# Altium PCB 避障车控制板.PcbDoc
Units mil, origin at the board's own origin, x right, y up, seen from the top; angles counter-clockwise.
Board outline 3937.01 x 3937.01 mil, 2 copper layers (Top Layer, Bottom Layer); 122 components, 91 nets, 417 pads, 156 vias.
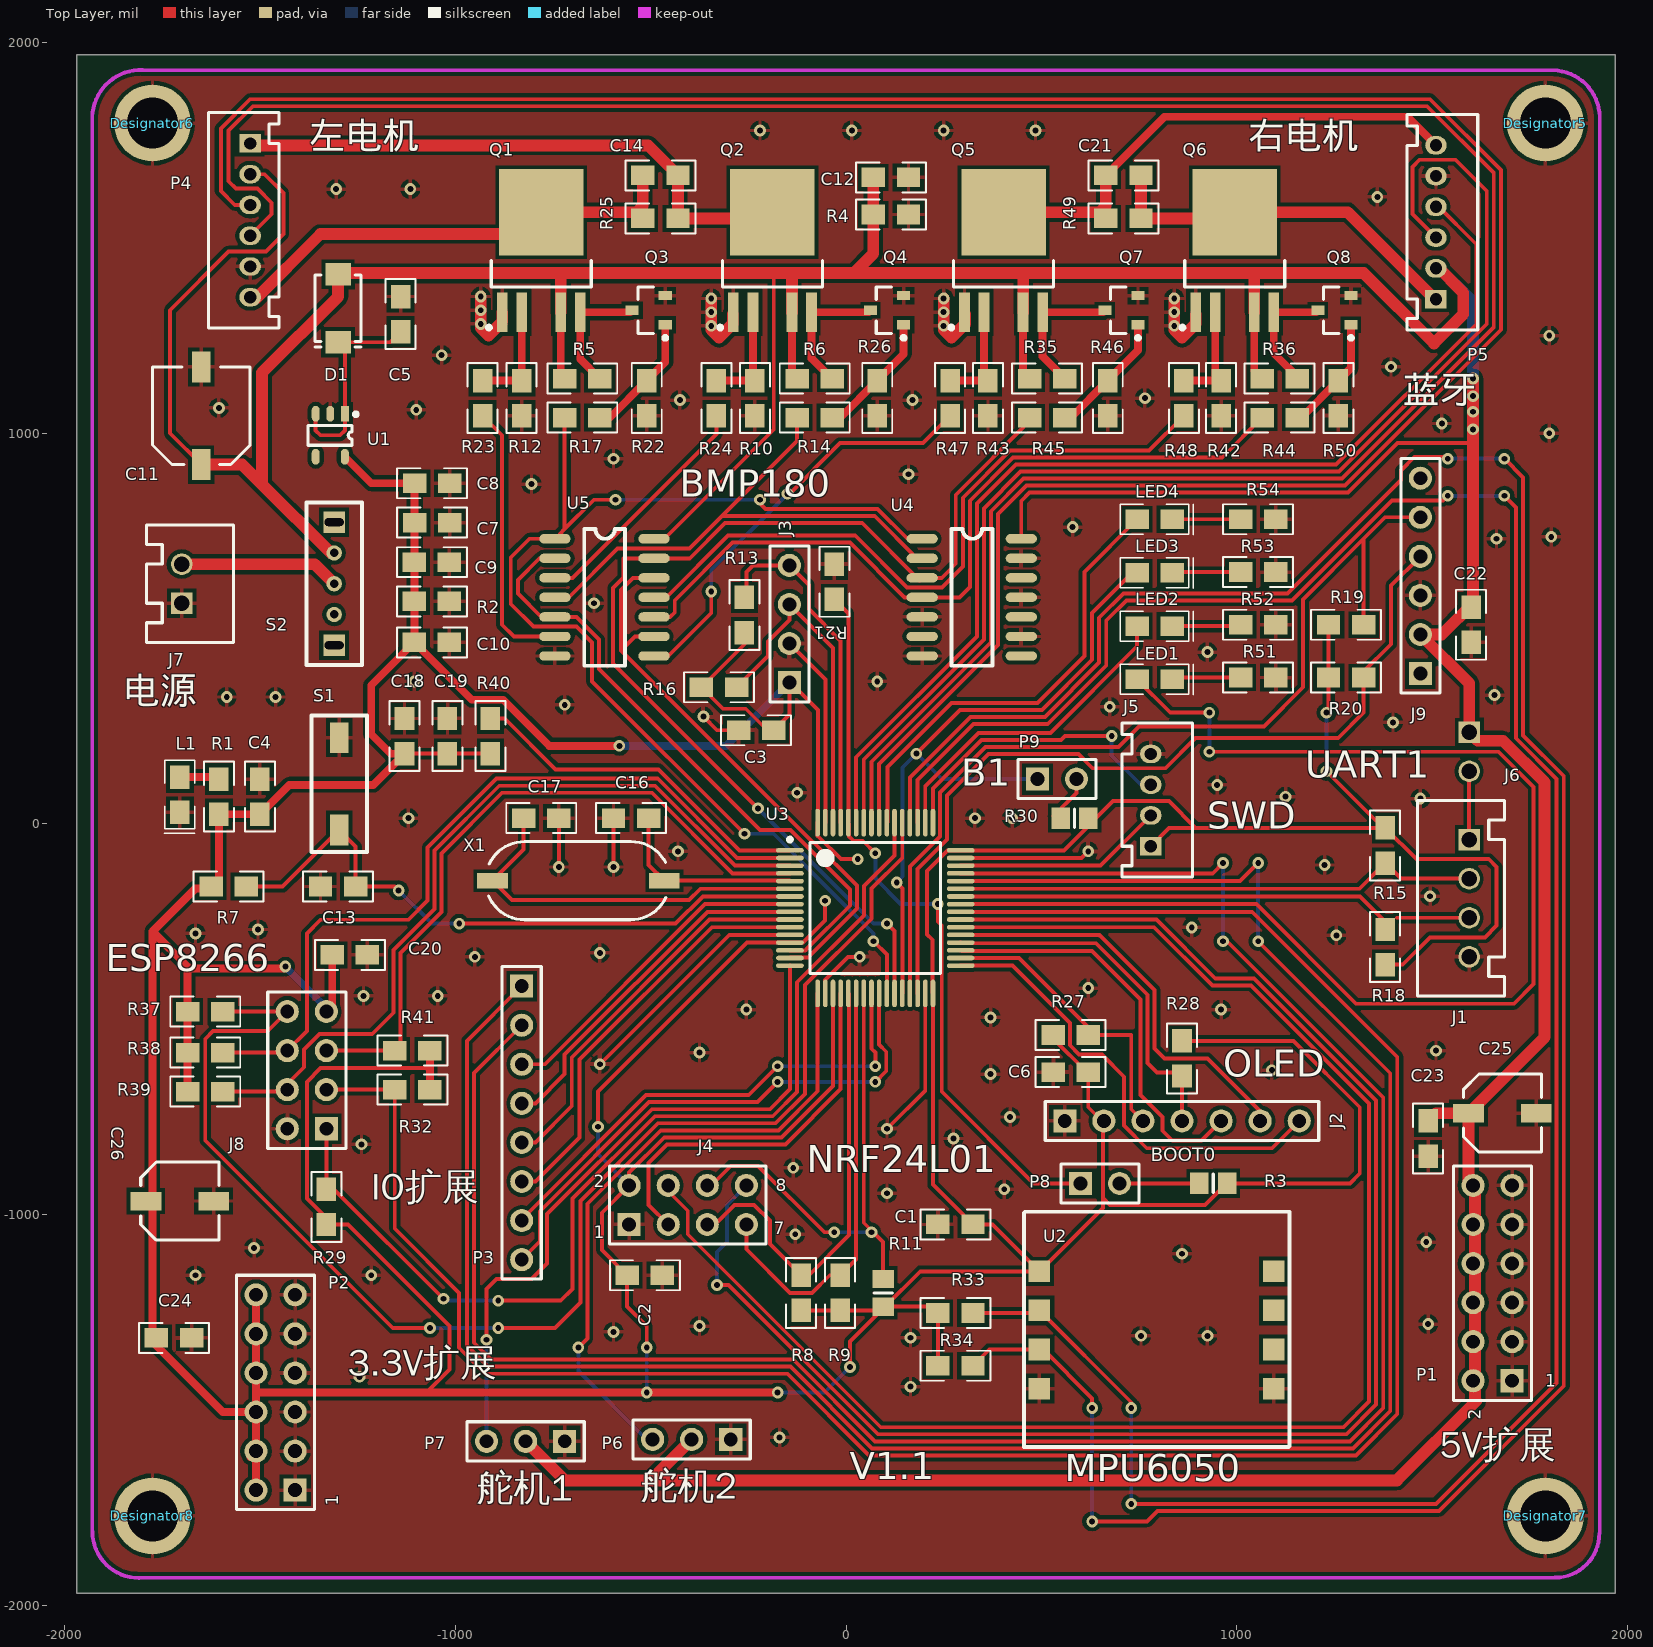
[diagram p0: Top Layer view]
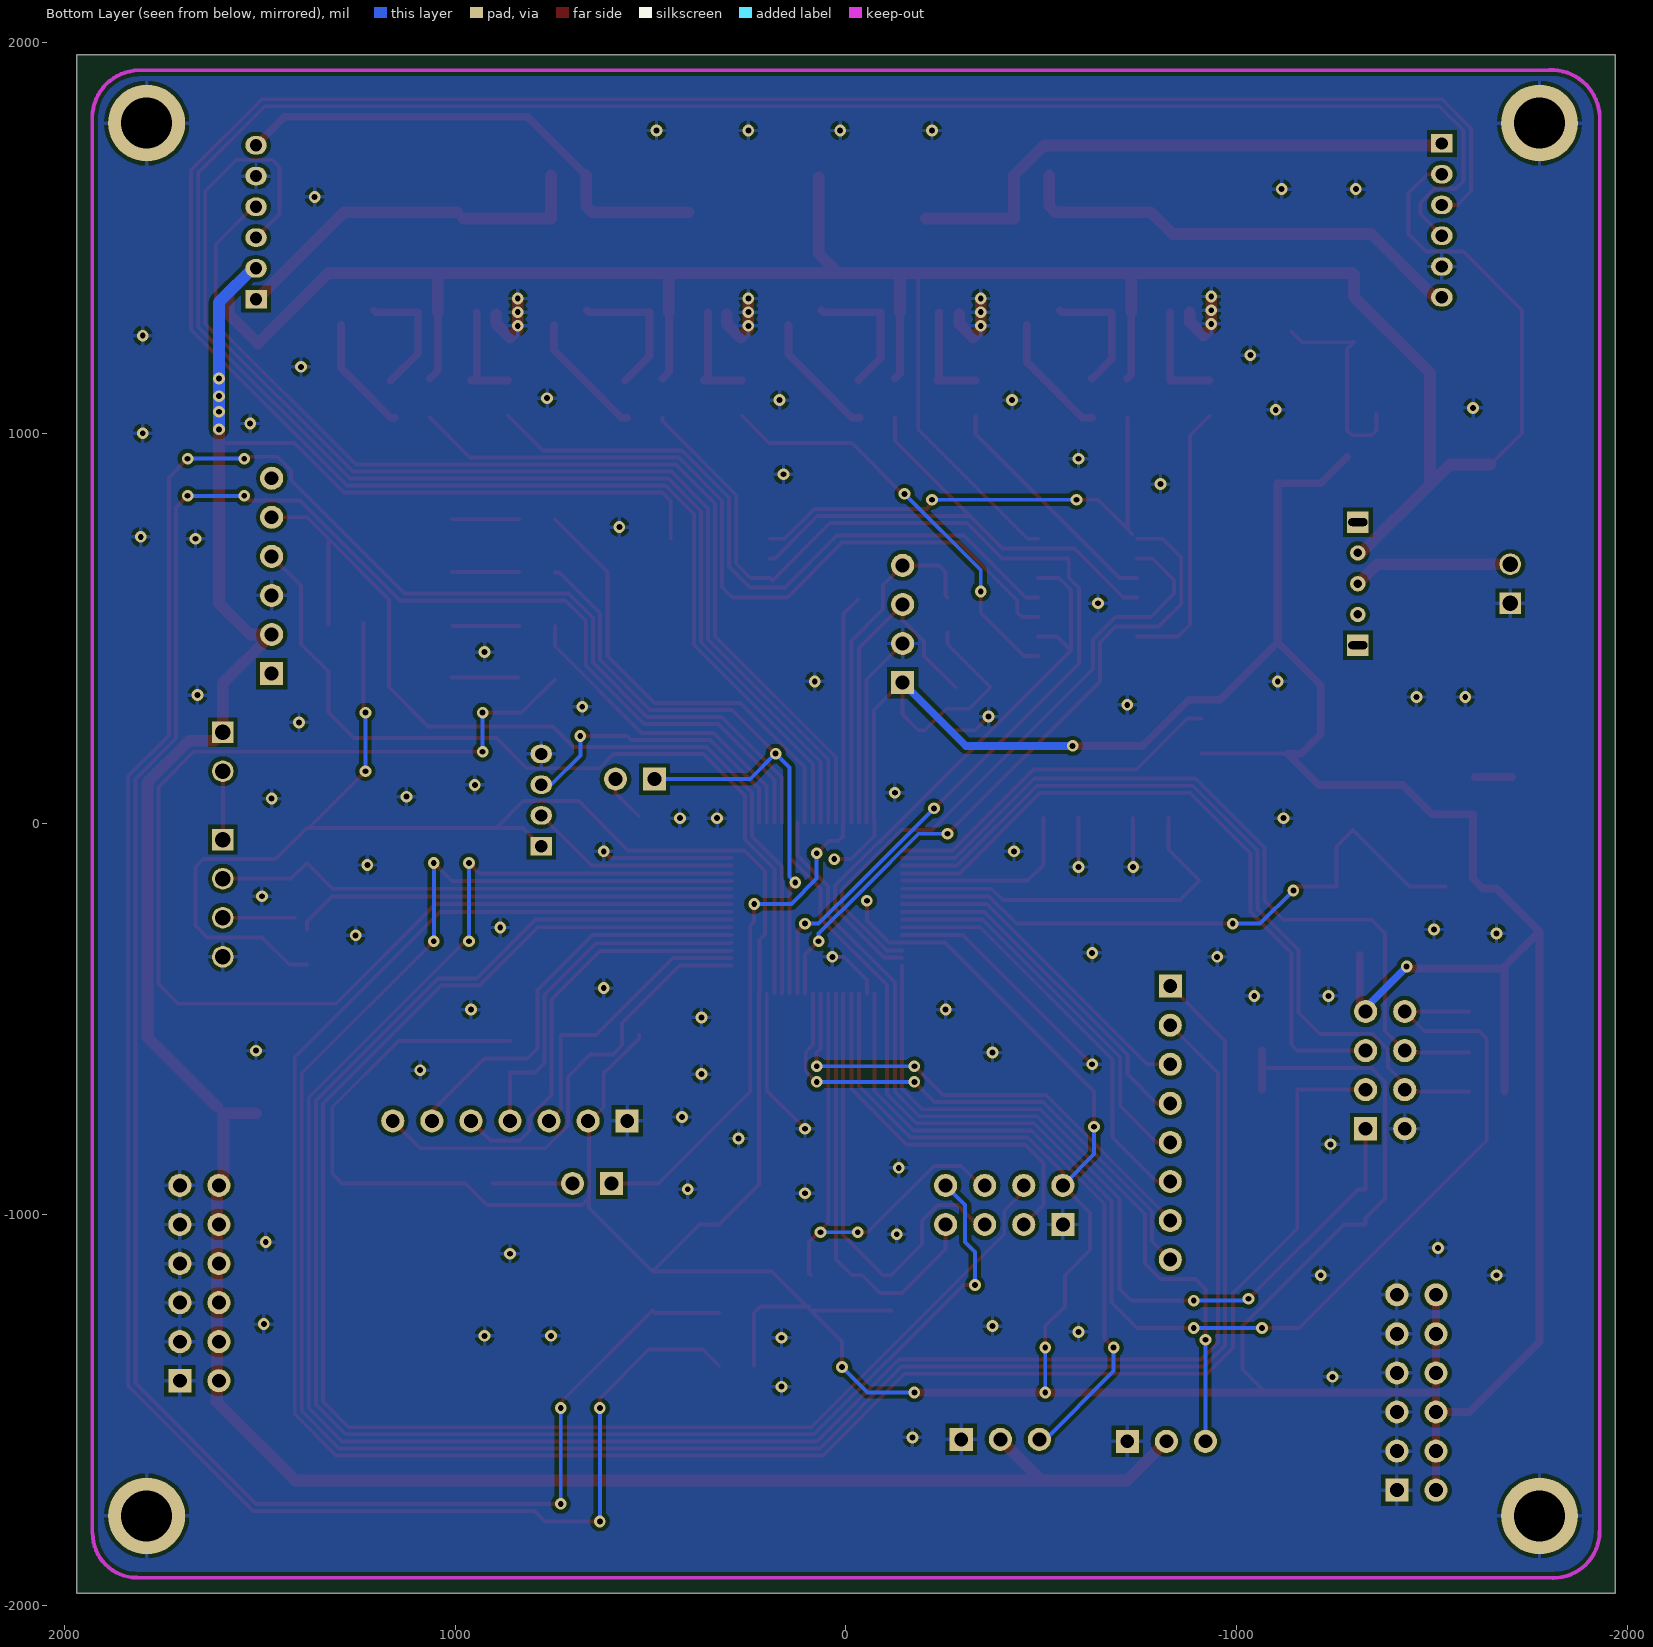
[diagram p1: Bottom Layer view, seen from below]

## Layer stack, top to bottom
Top Layer: signal copper 1.4
Dielectric: dielectric 12.6, FR-4, Dk 4.8
Bottom Layer: signal copper 1.4

## Board outline
-1968.5,-1968.5 1968.5,-1968.5 1968.5,1968.5 -1968.5,1968.5

## Design rules (kind name [scope] priority, off if disabled: settings)
Clearance juli [InPolygon] p1: gap=10
Clearance mcu [InComponent('u3')] p2: gap=6
Clearance [All] p3: gap=8
ComponentClearance [All] p1: gap=2 collisioncheckmode=3 verticalgap=2 showdistances=FALSE
HoleSize [All] p1: absolutevalues=TRUE maxlimit=129.92 minlimit=1 maxpercent=80.000 minpercent=20.000
MinimumSolderMaskSliver [All] p1: minsoldermaskwidth=5
PolygonConnect [All] p1: connectstyle=Relief reliefconductorwidth=10 reliefentries=4 polygonreliefangle="90 Angle"
RoutingVias [All] p1: holewidth=15 width=30 viastyle="Through Hole" minholewidth=5 minwidth=10 maxholewidth=40 maxwidth=50
SilkToSilkClearance [All] p1: silktosilkclearance=5
SilkscreenOverComponentPads [All] p1: minsilkscreentomaskgap=5
SolderMaskExpansion [All] p1: expansion=4
Width [All] p1: maxlimit=50 minlimit=10 preferedwidth=10
23 further rules are at their usual default settings.

## Components (designator, comment, footprint, x,y, rotation, side; value= is the part's Value field where it differs from the comment)
C1 "0.1uF" 0805_LY 280,-1025 r180 top
C2 "0.1uF" 0805_LY -515,-1155 r0 top
C3 "0.1uF" 0805_LY -230,240 r0 top
C4 "0.1uF" 0805_LY -1500,70 r90 top
C5 "1uF" 0805_LY -1140,1305 r270 top
C6 "0.1uF" 0805_LY 575,-635 r180 top
C7 "10uF" 0805_LY -1059.07,771.34 r0 top
C8 "0.1uF" 0805_LY -1059.07,872.11 r0 top
C9 "0.1uF" 0805_LY -1060,670 r180 top
C10 "0.1uF" 0805_LY -1060,465 r180 top
C11 "100uF" TC6.3*7.7 -1650,1045 r90 top
C12 "1uF/50V" 0805_LY 115,1655 r0 top
C13 "0.1uF" 0805_LY -1300,-160 r180 top
C14 "N/A" 0805_LY -475,1660 r180 top
C16 "20pF" 0805_LY -550,15 r0 top
C17 "20pF" 0805_LY -780,15 r180 top
C18 "1uF" 0805_LY -1130,225 r270 top
C19 "0.1uF" 0805_LY -1020,225 r270 top
C20 "0.1uF" 0805_LY -1270,-335 r180 top
C21 "N/A" 0805_LY 710,1660 r180 top
C22 "0.1uF" 0805_LY 1600,510 r90 top
C23 "0.1uF" 0805_LY 1490,-805 r270 top
C24 "0.1uF" 0805_LY -1720,-1315 r0 top
C25 "10uF" TC5*5 1680,-740 r0 top
C26 "10uF" TC5*5 -1705,-965 r0 top
D1 "SS14" SMA -1300,1320 r270 top
Designator5 "Comment" SH3.3 1790,1795 r0 top
Designator6 "Comment" SH3.3 -1775,1795 r0 top
Designator7 "Comment" SH3.3 1790,-1770 r0 top
Designator8 "Comment" SH3.3 -1775,-1770 r0 top
J1 "XH2.54-4P" XH2.54-4P 1595,-90 r270 top
J2 "Header 7" HDR1X7 560,-760 r0 top
J3 "PH2.0-4P" HDR1X4 -145,361.87 r90 top
J4 "Header 4X2" HDR2X4 -555,-1025 r0 top
J5 "PH2.0-4P" PH2.0-4P 780,140 r90 top
J6 "XH2.54-2P" CAP2.54-2P 1595,185 r270 top
J7 "Header 2" XH2.54-2P -1700,615 r90 top
J8 "Header 4X2" HDR2X4 -1330,-780 r90 top
J9 "2.54" HDR1X6 1470,385 r90 top
L1 "LED" 0805_LED -1705,75 r270 top
LED1 "LED-Y" 0805_LED 790,370 r0 top
LED2 "LED-Y" 0805_LED 790,506.67 r0 top
LED3 "LED-Y" 0805_LED 790,643.33 r0 top
LED4 "LED-Y" 0805_LED 790,780 r0 top
P1 "Header 6X2" HDR2X6 1705,-1425 r90 top
P2 "Header 6X2" HDR2X6 -1410,-1705 r90 top
P3 "extract" HDR1X8 -830,-415 r270 top
P4 "Header 6" PH2.0-6p -1525,1545 r270 top
P5 "Header 6" PH2.0-6p 1510,1540.26 r90 top
P6 "Header 3" HDR1X3 -295,-1575 r180 top
P7 "Header 3" HDR1X3 -720,-1580 r180 top
P8 "Header 2" HDR1X2 600,-920 r0 top
P9 "Header 2" HDR1X2 490,115 r0 top
Q1 "TO-252-4" TO-252-4L -880,1310 r90 top
Q2 "TO-252-4" TO-252-4L -288.33,1310 r90 top
Q3 "SOT-23" SOT-23_L -505,1315 r180 top
Q4 "SOT-23" SOT-23_L 105,1315 r180 top
Q5 "TO-252-4" TO-252-4L 303.33,1310 r90 top
Q6 "TO-252-4" TO-252-4L 895,1310 r90 top
Q7 "SOT-23" SOT-23_L 705,1315 r180 top
Q8 "SOT-23" SOT-23_L 1250,1315 r180 top
R1 "1K" 0805_LY -1605,70 r270 top
R2 "1K" 0805_LY -1060,570 r180 top
R3 "100K" 6-0805_N 940,-920 r0 top
R4 "10K" 0805_LY 115,1560 r180 top
R5 "10K" 0805_LY -675,1140 r180 top
R6 "10K" 0805_LY -80,1140 r180 top
R7 "10K" 0805_LY -1580,-160 r0 top
R8 "10K" 0805_LY -115,-1200 r90 top
R9 "10K" 0805_LY -15,-1200 r90 top
R10 "10K" 0805_LY -233.33,1090 r270 top
R11 "10K" 6-0805_N 95,-1200 r90 top
R12 "10K" 0805_LY -830,1090 r270 top
R13 "10K" 0805_LY -260,535 r270 top
R14 "1K" 0805_LY -80,1040 r0 top
R15 "10K" 0805_LY 1380,-315 r90 top
R16 "10K" 0805_LY -325,350 r180 top
R17 "1K" 0805_LY -675,1040 r180 top
R18 "10K" 0805_LY 1380,-55 r270 top
R19 "10K" 0805_LY 1280,510 r180 top
R20 "10K" 0805_LY 1280,375 r180 top
R21 "10K" 0805_LY -30,620 r90 top
R22 "10K" 0805_LY -510,1090 r90 top
R23 "10R" 0805_LY -930,1090 r270 top
R24 "10R" 0805_LY -331.67,1090 r270 top
R25 "N/A" 0805_LY -475,1550 r180 top
R26 "10K" 0805_LY 80,1090 r270 top
R27 "10K" 0805_LY 575,-540 r180 top
R28 "10K" 0805_LY 860,-600 r90 top
R29 "10K" 0805_LY -1330,-980 r90 top
R30 "100K" 6-0805_N 585,15 r0 top
R32 "10K" 0805_LY -1110,-680 r0 top
R33 "10K" 0805_LY 280,-1251.62 r180 top
R34 "10K" 0805_LY 280,-1386.62 r180 top
R35 "10K" 0805_LY 515,1140 r180 top
R36 "10K" 0805_LY 1110,1140 r180 top
R37 "10K" 0805_LY -1640,-480 r180 top
R38 "10K" 0805_LY -1640,-585 r180 top
R39 "10K" 0805_LY -1640,-685 r180 top
R40 "0R" 0805_LY -910,225 r90 top
R41 "10K" 0805_LY -1110,-580 r0 top
R42 "10K" 0805_LY 960,1090 r270 top
R43 "10K" 0805_LY 363.33,1090 r270 top
R44 "1K" 0805_LY 1110,1040 r0 top
R45 "1K" 0805_LY 515,1040 r180 top
R46 "10K" 0805_LY 670,1090 r90 top
R47 "10R" 0805_LY 266.67,1090 r270 top
R48 "10R" 0805_LY 865,1090 r270 top
R49 "N/A" 0805_LY 710,1550 r180 top
R50 "10K" 0805_LY 1260,1090 r270 top
R51 "10K" 0805_LY 1055,375 r0 top
R52 "10K" 0805_LY 1055,510 r0 top
R53 "10K" 0805_LY 1055,645 r0 top
R54 "10K" 0805_LY 1055,780 r0 top
S1 "SW-PB" SW-KEY -1368,-54.68 r90 top
S2 "SS12D07" SS-12D07 -1310,615 r270 top
U1 "XC6503D331" SOT23-5 -1320,995 r270 top
U2 "MPU6050S" MPU6050S 495,-1145 r0 top
U3 "STM32F103RCT6" LQFP64_N 75,-215 r0 top
U4 "74HCT14" SO-14 195,730 r0 top
U5 "74HCT08" SO-14 -745,730 r0 top
X1 "8M" HC-49SMD -685,-145 r0 top

## Footprints (in the part's own frame and the unit in brackets; to place one, negate y for a bottom-side part, rotate by r counter-clockwise, add the part's x,y. Pads: shape width x height; smd on the part's side, far side on the other; paste and mask are expansions set on the pad)
6-0805_N [mm]
  rect 1.2x1.4 smd: 1(-0.9,0) 2(0.9,0)
  silkscreen extent 0,-0.6 0,0.6, body extent -1.07,-0.7 1.07,0.7, height 0.7
0805_LED [mil]
  rect 60x50 smd: 1(-45,0) 2(45,0)
  silkscreen extent -88,-39 98,38
0805_LY [mil]
  rect 60x50 smd: 1(-45,0) 2(45,0)
  silkscreen extent -90,-38 90,38
CAP2.54-2P [mm]
  rect 1.4x1.4 hole 1: 1(-1.27,0)
  round 1.4 hole 1: 2(1.27,0)
HC-49SMD [mm]
  rect 2x1 smd: 1(-5.588,0) 2(5.588,0)
  silkscreen extent -5.84,-2.54 5.7,2.54
HDR1X2 [mm]
  rect 1.5x1.5 hole 0.9: 1(0,0)
  round 1.5 hole 0.9: 2(2.54,0)
  silkscreen extent -1.27,-1.27 3.81,1.27
HDR1X3 [mm]
  rect 1.5x1.5 hole 0.9: 1(0,0)
  round 1.5 hole 0.9: 2(2.54,0) 3(5.08,0)
  silkscreen extent -1.27,-1.27 6.35,1.27
HDR1X4 [mm]
  rect 1.5x1.5 hole 0.9: 1(0,0)
  round 1.5 hole 0.9: 2(2.54,0) 3(5.08,0) 4(7.62,0)
  silkscreen extent -1.27,-1.27 8.89,1.27
HDR1X6 [mm]
  rect 1.5x1.5 hole 0.9: 1(0,0)
  round 1.5 hole 0.9: 2(2.54,0) 3(5.08,0) 4(7.62,0) 5(10.16,0) 6(12.7,0)
  silkscreen extent -1.27,-1.27 13.97,1.27
HDR1X7 [mm]
  rect 1.5x1.5 hole 0.9: 1(0,0)
  round 1.5 hole 0.9: 2(2.54,0) 3(5.08,0) 4(7.62,0) 5(10.16,0) 6(12.7,0) 7(15.24,0)
  silkscreen extent -1.27,-1.27 16.51,1.27
HDR1X8 [mm]
  rect 1.5x1.5 hole 0.9: 1(0,0)
  round 1.5 hole 0.9: 2(2.54,0) 3(5.08,0) 4(7.62,0) 5(10.16,0) 6(12.7,0) 7(15.24,0) 8(17.78,0)
  silkscreen extent -1.27,-1.27 19.05,1.27
HDR2X4 [mm]
  rect 1.5x1.5 hole 0.9: 1(0,0)
  round 1.5 hole 0.9: 2(0,2.54) 3(2.54,0) 4(2.54,2.54) 5(5.08,0) 6(5.08,2.54) 7(7.62,0) 8(7.62,2.54)
  silkscreen extent -1.27,-1.27 8.89,3.81
HDR2X6 [mm]
  rect 1.5x1.5 hole 0.9: 1(0,0)
  round 1.5 hole 0.9: 2(0,2.54) 3(2.54,0) 4(2.54,2.54) 5(5.08,0) 6(5.08,2.54) 7(7.62,0) 8(7.62,2.54) 9(10.16,0) 10(10.16,2.54) 11(12.7,0) 12(12.7,2.54)
  silkscreen extent -1.27,-1.27 13.97,3.81
LQFP64_N [mm]
  oval 1.8x0.3 smd: 1(-5.55,3.75) 2(-5.55,3.25) 3(-5.55,2.75) 4(-5.55,2.25) 5(-5.55,1.75) 6(-5.55,1.25) 7(-5.55,0.75) 8(-5.55,0.25) 9(-5.55,-0.25) 10(-5.55,-0.75) 11(-5.55,-1.25) 12(-5.55,-1.75) 13(-5.55,-2.25) 14(-5.55,-2.75) 15(-5.55,-3.25) 16(-5.55,-3.75) 33(5.55,-3.75) 34(5.55,-3.25) 35(5.55,-2.75) 36(5.55,-2.25) 37(5.55,-1.75) 38(5.55,-1.25) 39(5.55,-0.75) 40(5.55,-0.25) 41(5.55,0.25) 42(5.55,0.75) 43(5.55,1.25) 44(5.55,1.75) 45(5.55,2.25) 46(5.55,2.75) 47(5.55,3.25) 48(5.55,3.75)
  oval 0.3x1.8 smd: 17(-3.75,-5.55) 18(-3.25,-5.55) 19(-2.75,-5.55) 20(-2.25,-5.55) 21(-1.75,-5.55) 22(-1.25,-5.55) 23(-0.75,-5.55) 24(-0.25,-5.55) 25(0.25,-5.55) 26(0.75,-5.55) 27(1.25,-5.55) 28(1.75,-5.55) 29(2.25,-5.55) 30(2.75,-5.55) 31(3.25,-5.55) 32(3.75,-5.55) 49(3.75,5.55) 50(3.25,5.55) 51(2.75,5.55) 52(2.25,5.55) 53(1.75,5.55) 54(1.25,5.55) 55(0.75,5.55) 56(0.25,5.55) 57(-0.25,5.55) 58(-0.75,5.55) 59(-1.25,5.55) 60(-1.75,5.55) 61(-2.25,5.55) 62(-2.75,5.55) 63(-3.25,5.55) 64(-3.75,5.55)
  silkscreen extent -5.67,-4.25 4.25,4.57
MPU6050S [mm]
  rect 1.4x1.4 smd: 1(0,0) 2(0,-2.54) 3(0,-5.08) 4(0,-7.62) 5(15.24,0) 6(15.24,-2.54) 7(15.24,-5.08) 8(15.24,-7.62)
  silkscreen extent -1,-11.43 16.25,3.88
PH2.0-4P [mm]
  rect 1.2x1.4 hole 0.8: 1(-5,0)
  oval 1.2x1.4 hole 0.8: 2(-3,0) 3(-1,0) 4(1,0)
  silkscreen extent -7.01,-2.72 3,1.88
PH2.0-6p [mm]
  rect 1.2x1.4 hole 0.8: 1(-5,0)
  oval 1.2x1.4 hole 0.8: 2(-3,0) 3(-1,0) 4(1,0) 5(3,0) 6(5,0)
  silkscreen extent -7.01,-2.72 7,1.88
SH3.3 [mm]
  round 5 hole 3.3: 1(0,-0.025)
SMA [mm]
  rect 1.45x1.65 smd: 1(-2.21,0) 2(2.21,0)
  silkscreen extent -2.16,-1.5 2.51,1.5
SO-14 [mil]
  oval 80x24 smd: 1(0,0) 2(0,-50) 3(0,-100) 4(0,-150) 5(0,-200) 6(0,-250) 7(0,-300) 8(253.66,-300) 9(253.66,-250) 10(253.66,-200) 11(253.66,-150) 12(253.66,-100) 13(253.66,-50) 14(253.66,0)
  silkscreen extent 75,-325 180,25
SOT23-5 [mil] "SO"
  rect 40x20 smd: 1(-55,37.4)
  oval 40x20 smd: 2(-55,0) 3(-55,-37.4) 4(55,-37.4) 5(55,37.4)
  silkscreen extent -59,-57 26,70
SOT-23_L [mm] "SOT23, 3-Leads, Body 2.9"
  rect 0.85x0.6 smd: 1(-1.075,0.95) 2(-1.075,-0.95) 3(1.075,0)
  silkscreen extent -1.2,-1.5 0.7,1.92, body extent -0.7,-1.5 0.7,1.5, height 1.1
SS-12D07 [mm]
  round 1 hole 0.55: 1(-2,0) 2(0,0) 3(2,0)
  rect 1.4x1.4 hole 0.5 slot 1.25 at 90 deg: ""(-4,0) ""(4,0)
  silkscreen extent -5.28,-1.8 5.28,1.8
SW-KEY [mm]
  rect 2x1.2 smd: 1(1,-1.8) 2(7,-1.8)
  silkscreen extent -0.43,-3.6 8.45,0
TC5*5 [mm]
  rect 2x1.2 smd: 1(-2.2,0) 2(2.2,0)
  silkscreen extent -2.54,-2.54 2.54,2.54
TC6.3*7.7 [mm]
  rect 2x1.2 smd: 1(-3.175,0) 2(3.175,0)
  silkscreen extent -3.17,-3.17 3.18,3.18
TO-252-4L [mm]
  rect 2.55x0.7 smd: 1(0,0) 2(0,-1.27) 3(0,-3.81) 4(0,-5.08)
  rect 5.6x5.5 smd: 5(6.5,-2.54)
  silkscreen extent -1.12,-5.79 3.35,0.98
XH2.54-2P [mm]
  rect 1.4x1.4 hole 1: 1(-1.27,0)
  round 1.4 hole 1: 2(1.27,0)
  silkscreen extent -3.81,-3.35 3.81,2.29
XH2.54-4P [mm]
  rect 1.4x1.4 hole 1: 1(-1.27,0)
  round 1.4 hole 1: 2(1.27,0) 3(3.81,0) 4(6.35,0)
  silkscreen extent -3.81,-3.35 8.89,2.29

## Part data
C1 C2 C4 C5 C6 C7 C8 C9 C10 C12 C13 C14 C16 C17 C18 C19 C20 C21 C22: library part Cap, "Cap"
C3 C23 C24: library part Cap
C11: library part Cap100uf, "100"
C25 C26: library part Cap10uf, "10"
J1 J6: "²"
J2 J7 P4 P5 P6 P7: "Header,"
J3 J5: library part "Header 4", "Header,"
J4 J8: "Header, 4-Pin, Dua"
J9: library part "Header 6", "Heade"
P1 P2: "Header, 6-Pin, Dua"
P3: library part "Header 8", "Header,"
P8 P9: "He"
Q1 Q2 Q5 Q6: library part MOS-DU
Q3 Q4 Q7 Q8: library part NPN, "NPN Bipolar Transistor"
R1 R2 R4 R5 R6 R7 R10 R12 R14 R17 R21 R22 R23 R24 R25 R26 R35 R36 R40 R42 R43 R44 R45 R46 R47 R48 R49 R50: library part Res1, "Re"
R3 R8 R9 R11 R13 R15 R16 R18 R19 R20 R27 R28 R29 R30 R32 R33 R34 R37 R38 R39 R41 R51 R52 R53 R54: library part Res
U1: library part XC6503Dxxx
U3: "256K Flas"
U4: "反向输"
U5: "与门"

## Via types
v1: diameter 30, hole 15, Top Layer to Bottom Layer, tented both sides, 156 vias

## Nets (pads, with @x,y where several pads share a name; then routed paths per layer and width w, separated by ;. In a path a pad name is that pad's centre, name@x,y a point inside that pad or via, vN(x,y) a via of type N, cw(c..) or ccw(c..) an arc to the next point about the centre after c; other vN are vias at no path point)
BMP180_SCL: J3.3 R16.1 U3.62 | length 872.4
  Top Layer w10: R16.1 -200,430 -200,467.01 -145,522.01 J3.3 -33.27,450.14 U3.62
BMP180_SDA: J3.4 R13.1 U3.61 | length 896.9
  Top Layer w10: R13.1 -255,585 -255,645 -238.13,661.87 J3.4 -95,611.87 -95,550 -13.58,468.58 U3.61
BOOT0: P8.1 R21.1 U3.60 | length 1913.1
  Top Layer w10: R21.1 6.1,538.9 U3.60 7.79,1.82 7.79,-31.93 18.78,-42.93 42.93,-42.93 v1(75,-75) ; v1@230,-200 v1(235,-205) 235,-249.31 245,-259.31 245,-685 480,-920 P8.1@610,-920
  Bottom Layer w10: v1(75,-75) 75,-140 140,-205 v1(235,-205)
ESP_CH_PD: J8.3 R32.1 U3.40 | length 5648.1
  Top Layer w10: J8.3 R32.1 -1155,-1035 -990,-1200 -990,-1340.51 -923.51,-1407 -149.82,-1407 59.18,-1616 1304.91,-1616 1411,-1509.91 1411,-596 1039.84,-224.84 U3.40
ESP_GP0: J8.6 R38.1 U3.2 | length 2052
  Top Layer w10: R38.1 -1435,-585 J8.6 -1380,-530 -1380,-280 -1345,-245 -1120,-245 -1071,-196 -1071,-60.09 -894.91,116 -481.7,116 -278.66,-87.05 U3.2
ESP_GP2: J8.4 R39.1 U3.3 | length 2077.7
  Top Layer w10: R39.1 -1435,-685 J8.4 -1430,-665.06 -1387.47,-622.53 -1387.47,-577.33 -1347.62,-537.47 -1212.47,-537.47 -1158,-483 -1158,-322.54 -1053,-217.54 -1053,-67.54 -887.46,98 -489.16,98 -284.43,-106.73 U3.3
ESP_GP16: J8.5 R41.1 U3.4 | length 1770.9
  Top Layer w10: J8.5 R41.1 -1140,-565 -1140,-330 -1035,-225 -1035,-75 -880,80 -496.62,80 -290.2,-126.42 U3.4
ESP_URXD: J8.8 R37.1 U3.53 | length 3596.1
  Top Layer w10: R37.1 J8.8 -1480,-530 -1620,-530 -1640,-550 -1640,-810 -1160,-1290 v1(-1065,-1290) ; v1(-890,-1290) -745,-1290 -680,-1225 -680,-964.4 -481.6,-766 -180.09,-766 -105,-690.91 -105,-412.43 65,-242.43 65,-165.46 143.9,-86.56 U3.53
  Bottom Layer w10: v1(-1065,-1290) v1(-890,-1290)
ESP_UTXD: J8.1 R29.2 U3.54 | length 2622
  Top Layer w10: J8.1 R29.2 -1310,-935 v1(-1030,-1215) ; v1@-885,-1220 -730,-1220 -700,-1190 -700,-958.95 -489.05,-748 -187.54,-748 -125,-685.46 -125,-405 46,-234 46,-159 124.21,-80.79 U3.54
  Bottom Layer w10: v1(-1030,-1215) -1025,-1220 v1(-890,-1220)
EXTRACT1: P3.1 U3.44 | length 5812.6
  Top Layer w10: P3.1 -970,-555 -970,-1335.05 -916.05,-1389 -142.37,-1389 66.63,-1598 1297.46,-1598 1393,-1502.46 1393,-638 v1(1055,-300) ; U3.44 1008.9,-146.1 v1(1055,-100)
  Bottom Layer w10: v1(1055,-300) v1(1055,-100)
EXTRACT2: P3.2 U3.45 | length 5583
  Top Layer w10: P3.2 -952,-637 -952,-1327.6 -908.6,-1371 -134.91,-1371 74.09,-1580 1290,-1580 1375,-1495 1375,-700 975,-300 v1(965,-300) ; U3.45 938.58,-126.42 v1(965,-100)
  Bottom Layer w10: v1(965,-300) v1(965,-100)
EXTRACT3: P3.3 U3.8 | length 856.3
  Top Layer w10: P3.3 -770.46,-615 -360.61,-205.16 U3.8
EXTRACT4: P3.4 U3.9 | length 918.8
  Top Layer w10: P3.4 -795,-715 -720,-640 -720,-590 -354.84,-224.84 U3.9
EXTRACT5: P3.5 U3.10 | length 995.7
  Top Layer w10: P3.5 -795,-815 -702,-722 -702,-597.46 -349.07,-244.53 U3.10
EXTRACT6: P3.6 U3.11 | length 1072.7
  Top Layer w10: P3.6 -795,-915 -682.04,-802.04 -682.04,-602.96 -343.3,-264.21 U3.11
EXTRACT7: P3.7 U3.24 | length 1255.6
  Top Layer w10: P3.7 -830,-1012.58 -511.42,-694 -249,-694 v1(-175,-620) ; U3.24 65.16,-575.16 75,-585 v1(75,-620)
  Bottom Layer w10: v1@-170,-620 v1(75,-620)
EXTRACT8: P3.8 U3.25 | length 1379.2
  Top Layer w10: P3.8 -783,-1068 -783,-991.03 -503.97,-712 -227,-712 v1(-175,-660) ; v1(75,-660) 103,-632 103,-583 84.84,-564.84 U3.25
  Bottom Layer w10: v1@-170,-660 v1(75,-660)
GND: C1.2 C2.2 C3.1 C4.2 C5.1 C6.2 C7.2 C8.2 C9.1 C10.1 C11.2 C12.2 C13.2 C16.1 C17.1 C18.1 C19.1 C20.1 C22.1 C23.2 C24.2 C25.2 C26.2 Designator5.1 Designator6.1 Designator7.1 Designator8.1 J1.4 J2.1 J3.2 J4.1 J5.4 J7.1 J8.2 J9.3 L1.2 P1.1 P1.3 P1.5 P1.7 P1.9 P1.11 P2.1 P2.3 P2.5 P2.7 P2.9 P2.11 P4.5 P5.5 P6.1 P7.1 Q1.1 Q2.1 Q3.2 Q4.2 Q5.1 Q6.1 Q7.2 Q8.2 R2.1 R4.1 R10.2 R12.2 R21.2 R22.1 R26.2 R42.2 R43.2 R46.1 R50.2 R51.2 R52.2 R53.2 R54.2 S1.2 U1.2 U2.4 U2.8 U3.12 U3.18 U3.31 U3.47 U3.63 U4.5 U4.7 U4.9 U4.11 U4.13 U5.7 | length 3074.1
  Top Layer w10: v1(-735,-110) C17.1 ; v1(-630,-615) -298.9,-283.9 U3.12 ; v1(-595,-110) C16.1 ; v1(-365,275) -330,240 C3.1 ; J3.2 -52.95,369.82 U3.63 ; U3.18@-54.05,-433.5 -54.05,-399.5 5.46,-340 v1(35,-340) ; v1(105,-780) 202.95,-682.05 U3.31 ; U3.47 602.95,-87.05 v1(620,-70)
  Top Layer w30: v1(-935,1350) -935,1270 -915,1250 -880,1285 Q1.1 ; v1(-345,1345) -345,1265 -325,1245 -290,1280 Q2.1@-290,1305 ; v1(250,1345) 250,1265 270,1245 305,1280 Q5.1@305,1305 ; v1(840,1345) 840,1265 860,1245 895,1280 Q6.1@895,1305
  other v1: -170,-1570 165,-1440 -1245,-1415 165,-1315 755,-1310 925,-1310 -595,-1300 -375,-1285 1490,-1280 -1665,-1155 -1215,-1155 860,-1100 -1515,-1085 1485,-1070 -130,-1050 105,-945 405,-935 -135,-880 -1240,-820 275,-805 420,-750 370,-640 1090,-630 -375,-585 1510,-580 370,-495 -255,-475 960,-475 -1235,-440 -1045,-440 620,-420 -950,-340 -630,-330 1255,-285 -1665,-280 -1505,-270 885,-265 1495,-185 1225,-105 -430,-70 -1120,15 330,15 425,15 1470,65 1125,70 -125,80 950,100 1400,260 675,300 -720,305 -1585,325 -1460,325 1660,330 -1105,365 80,365 925,440 -645,565 1665,730 1805,735 580,760 -805,870 160,895 -595,935 1800,1000 1525,1025 -1100,1060 -1605,1065 -425,1085 170,1085 765,1090 1395,1170 -1035,1200 1800,1250 -345,1275 250,1275 840,1275 -935,1280 -345,1310 250,1310 840,1310 -935,1315 1360,1605 -1305,1625 -1115,1625 -220,1775 15,1775 250,1775 485,1775
HC-EN: J9.1
HC-RX: J9.5 R19.1 U3.29 | length 2419
  Top Layer w10: U3.29 163.58,-108.99 240.64,-31.93 240.64,80.64 357,197 697,197 750,250 1070,250 1170,350 1170,575 1325,730 ; R19.1 1325,730 ; J9.5 1380,785 1325,730
HC-STATUS: J9.6
HC-TX: J9.4 R20.1 U3.30 | length 2182.1
  Top Layer w10: U3.30 183.27,-114.76 258.64,-39.39 258.64,73.18 364.46,179 595,179 631.25,142.75 817.75,142.75 895,220 1260,220 1325,285 R20.1 1325,390 1395,460 1395,610 J9.4
LED1: LED1.1 U3.41 | length 3285.3
  Top Layer w10: U3.41 1050.16,-205.16 1305,-460 1710,-460 1760,-410 1760,95 1670,185 v1(930,185) ; LED1.1 830,285 v1(930,285)
  Bottom Layer w10: v1(930,185) v1(930,285)
LED2: LED2.1 U3.50 | length 835.5
  Top Layer w10: U3.50 202.95,97.04 338.91,233 523,233 745,455 LED2.1
LED3: LED3.1 P9.1 U3.28 | length 1803.2
  Top Layer w10: v1(130,-150) 145,-165 U3.28@145,-432.4 ; v1(180,180) 292,292 501.54,292 630,420.46 630,540 733.33,643.33 LED3.1
  Bottom Layer w10: v1(130,-150) 145,-135 145,145 v1(180,180) 245,115 P9.1
LED4: LED4.1 U3.55 | length 1170.4
  Top Layer w10: U3.55 106.21,5.19 106.21,145.81 270.4,310 490,310 610,430 610,645 LED4.1
M1-A: C14.2 P4.6 Q1.5 R25.2 | length 1168.9
  Top Layer w30: P4.6@-1511.85,1343.15 -1345,1510 -835.91,1510 Q1.5 -535.91,1565.91 -520,1581.81 C14.2
M1-B: C14.1 P4.1 Q2.5 R25.1 | length 1462.6
  Top Layer w30: P4.1@-1525,1736.85 -506.85,1736.85 C14.1 R25.1 Q2.5@-204.24,1550
M1-DIR: R17.2 U3.26 U4.1 U5.1 | length 3051.2
  Top Layer w10: U5.1 -810,730 -858,682 -858,563 -800,505 -690,505 -650,465 -650,365 v1(-260,-25) ; -732.5,742.5 -720,755 ; R17.2 -720,755 ; v1(-590,830) -645,830 -720,755 ; v1(-220,830) -220,820 -206,806 81.1,806 157.1,730 U4.1 ; v1(70,-300) 104.53,-334.53 U3.26
  Bottom Layer w10: v1(-590,830) v1(-220,830) ; v1(-260,-25) -185.46,-25 -41.9,-168.56 -41.84,-168.56 70,-280.4 v1(70,-300)
M1-DIR-N: R14.1 U4.2 U5.4 | length 1402.6
  Top Layer w10: U5.4 -709.54,580 -584.54,705 -400.46,705 -317.46,788 ; R14.1 -125,980.46 -317.46,788 ; U4.2 181.64,680 73.64,788 -317.46,788
M1-ENC-A: P4.3 U3.56 | length 6438.8
  Top Layer w10: P4.3 -1564.37,1584.37 -1600,1620 -1600,1780 -1525,1855 1495,1855 1676,1674 1676,1265.09 1276.91,866 461.91,866 389,793.09 389,457.63 84.84,153.48 U3.56
M1-ENC-B: P4.4 U3.57 | length 6504.2
  Top Layer w10: P4.4 -1470,1560.63 -1470,1590 -1506.49,1626.49 -1561.49,1626.49 -1580,1645 -1580,1774.54 -1517.54,1837 1487.54,1837 1658,1666.54 1658,1272.54 1269.46,884 454.46,884 371,800.54 371,465.09 65.16,159.25 U3.57
M1-PWM-A: R23.2 U5.6 | length 703.1
  Top Layer w10: R23.2 -880,995 -880,510 -850,480 U5.6
M1-PWM-B: R24.2 U5.3 | length 612.6
  Top Layer w10: U5.3 -700,630 -331.67,998.33 R24.2
M1_PWM: U3.14 U5.2 U5.5 | length 1603.3
  Top Layer w10: U5.2 -785,680 -840,625 -840,590 -780,530 U5.5 -689.54,530 -632,472.46 -632,397 -220,-15 -142.43,-15 10,-167.43 10,-209.28 -99.52,-318.8 -99.71,-318.8 -104.18,-323.27 U3.14
M2-A: C21.2 P5.6 Q5.5 R49.2 | length 1283.8
  Top Layer w20: C21.2 815,1810 1437.11,1810 P5.6
  Top Layer w30: Q5.5 649.09,1565.91 665,1581.81 C21.2
M2-B: C21.1 P5.1 Q6.5 R49.1 | length 940.3
  Top Layer w30: C21.1 R49.1 Q6.5@979.09,1550 ; Q6.5 1284.09,1565.91 P5.1@1508.3,1341.7
M2-DIR: R45.2 U3.27 U4.3 U5.13 | length 2862.1
  Top Layer w10: v1(-225,40) -596.06,411.06 -596.06,604.4 -570,630.46 -570,680 U5.13 -400,680 -310,770 41.64,770 188.32,623.32 U4.3 245,630 281,666 281,842.37 470,1031.37 R45.2 ; v1(105,-255) 124.21,-274.21 U3.27
  Bottom Layer w10: v1(-225,40) -34.44,-150.56 -34.39,-150.56 70.05,-255 v1(105,-255)
M2-DIR-N: R44.1 U4.4 U5.10 | length 2030.3
  Top Layer w10: U5.10 -450,530 -438.34,541.66 -438.34,571.66 -290,720 10,720 150,580 U4.4 290,580 317,607 317,827.46 427.54,938 963,938 R44.1
M2-ENC-A: P5.3 U3.58 | length 3190.9
  Top Layer w10: U3.58 45.47,165.02 353,472.54 353,808 447,902 1262,902 1640,1280 1640,1620 1560,1700 1468.02,1700 1450,1681.98 1450,1560.89 P5.3
M2-ENC-B: P5.4 U3.59 | length 2758.4
  Top Layer w10: U3.59 25.79,170.79 335,480 335,820 435,920 1254.54,920 1613,1278.46 1613,1483.91 P5.4@1513.64,1583.27
M2-PWM-A: R47.2 U5.8 | length 1084.3
  Top Layer w10: U5.8 -455,430 -345,540 v1(-345,595) ; v1(-150,845) -150,840 -15,975 196.67,975 R47.2
  Bottom Layer w10: v1(-345,595) -345,650 v1(-150,845)
M2-PWM-B: R48.2 U5.11 | length 1762.4
  Top Layer w10: U5.11 -460,580 -302,738 23.64,738 156.64,605 245.46,605 299,658.54 299,834.91 420.09,956 776,956 R48.2
M2_PWM: U3.15 U5.9 U5.12 | length 1488.2
  Top Layer w10: U5.9 -540,480 -575.99,444.01 ; U5.12 -545,630 -575.99,599.01 -575.99,444.01 ; U3.15 -141.82,-341.27 -96.72,-341.27 -92.26,-336.8 -92.06,-336.8 28,-216.74 28,-157.54 -82.54,-47 -84.97,-47 -472.52,340.54 -575.99,444.01
MPU6050_RX: R33.1 U2.2 U3.51 | length 6288.2
  Top Layer w10: U3.51 183.27,112.81 326.46,256 516.46,256 666,405.54 666,520.54 717.46,572 1141.54,572 1397.07,827.53 1527.53,827.53 v1(1540,840) ; R33.1 488.38,-1251.62 U2.2 730,-1480 v1(730,-1495) ; v1(730,-1740) 1510,-1740 1818.98,-1431.02 1818.98,115.56 1715,219.54 1715,810 v1(1685,840)
  Bottom Layer w10: v1(730,-1740) v1(730,-1495) ; v1(1540,840) v1(1685,840)
MPU6050_TX: R34.1 U2.3 U3.52 | length 6536.8
  Top Layer w10: U3.52 163.58,118.58 319,274 509,274 648,413 648,528 710,590 1130,590 1420,880 1420,905 1455,940 1535,940 v1(1540,935) ; R34.1 366.62,-1345 U2.3 505,-1345 630,-1470 v1(630,-1495) ; v1(630,-1785) 770,-1785 797,-1758 1517.46,-1758 1836.98,-1438.47 1836.98,123.02 1733,227 1733,887 v1(1685,935)
  Bottom Layer w10: v1(630,-1785) v1(630,-1495) ; v1(1540,935) v1(1685,935)
NetC5_2: C5.2 D1.2 U1.1 U1.3 | length 531.7
  Top Layer w10: U1.3 -1357.4,1007.4 -1345,995 -1295,995 -1282.6,1007.4 U1.1 -1282.6,1215.6 D1.2 -1167,1233 C5.2
NetC16_2: C16.2 U3.5 X1.2 | length 497
  Top Layer w10: C16.2 -505,-105 X1.2 U3.5@-144.61,-145
NetC17_2: C17.2 U3.6 X1.1 | length 987.4
  Top Layer w10: C17.2 -825,-65 X1.1 -855,-195 -401.37,-195 -372.15,-165.79 U3.6
NetJ1_1: J1.1 J6.2 | length 175
  Top Layer w10: J1.1 J6.2
NetJ7_2: J7.2 S2.2 | length 410.7
  Top Layer w30: J7.2 -1360,665 S2.2
NetL1_1: L1.1 R1.1 | length 95
  Top Layer w20: L1.1 R1.1@-1610,120
NetLED1_2: LED1.2 R51.1 | length 170
  Top Layer w10: LED1.2@840,375 R51.1
NetLED2_2: LED2.2 R52.1 | length 171.7
  Top Layer w10: LED2.2 R52.1@1006.67,506.67
NetLED3_2: LED3.2 R53.1 | length 173.3
  Top Layer w10: LED3.2@836.67,645 R53.1
NetLED4_2: LED4.2 R54.1 | length 175
  Top Layer w10: LED4.2 R54.1
NetP8_2: P8.2 R3.1 | length 194.6
  Top Layer w10: P8.2@710,-920 R3.1
NetP9_2: P9.2 R30.1 | length 119.7
  Top Layer w10: R30.1@530.43,20 590,79.57 P9.2
NetQ1_2: Q1.2 R12.1 R23.1 | length 275
  Top Layer w20: R23.1 R12.1 Q1.2
NetQ1_4: Q1.4 Q3.3 R5.1 | length 325.5
  Top Layer w20: R5.1 -680,1190 Q1.4 -552.32,1310 Q3.3
NetQ2_2: Q2.2 R10.1 R24.1 | length 275.4
  Top Layer w20: R24.1 R10.1 -238.33,1140 Q2.2
NetQ2_4: Q2.4 Q4.3 R6.1 | length 351.6
  Top Layer w20: R6.1@-31.67,1135 -88.33,1191.67 Q2.4 57.68,1310 Q4.3
NetQ3_1: Q3.1 R17.1 R22.2 | length 321.6
  Top Layer w20: R17.1 -605,1040 R22.2 -462.68,1182.32 Q3.1
NetQ4_1: Q4.1 R14.2 R26.1 | length 324.8
  Top Layer w20: R14.2 -15,1040 R26.1 147.32,1202.32 Q4.1
NetQ5_2: Q5.2 R43.1 R47.1 | length 275.8
  Top Layer w20: R47.1 R43.1 353.33,1145 Q5.2
NetQ5_4: Q5.4 Q7.3 R35.1 | length 362
  Top Layer w20: R35.1@565,1135 503.33,1196.67 Q5.4 657.68,1310 Q7.3
NetQ6_2: Q6.2 R42.1 R48.1 | length 255
  Top Layer w20: R48.1 R42.1 ; R42.1@945,1150 Q6.2
NetQ6_4: Q6.4 Q8.3 R36.1 | length 318.7
  Top Layer w20: R36.1@1165,1135 1095,1205 Q6.4 1202.68,1310 Q8.3
NetQ7_1: Q7.1 R45.1 R46.2 | length 324
  Top Layer w20: R45.1 575,1040 R46.2 747.32,1212.32 Q7.1
NetQ8_1: Q8.1 R44.2 R50.1 | length 300.3
  Top Layer w20: R44.2 1165,1040 R50.1 1292.32,1167.32 Q8.1
NetR40_2: R40.2 U3.1 | length 905.9
  Top Layer w10: R40.2 -873.39,270 -743.38,140 -480.25,140 -272.4,-67.85 U3.1@-143.99,-67.85
NRF_CE: J4.3 U3.20 | length 993.1
  Top Layer w10: J4.3 -505,-975 -505,-867.28 -457.72,-820 -155,-820 -13.58,-678.58 U3.20
NRF_CSN: J4.4 U3.38 | length 4117
  Top Layer w10: J4.4 -455,-939.94 -405,-989.94 -405,-1050 89,-1544 1273.1,-1544 1339,-1478.1 1339,-714.91 1037.09,-413 937.54,-413 788.76,-264.21 U3.38
NRF_IRQ: J4.8 U3.39 | length 4196.3
  Top Layer w10: v1(-330,-1180) -300.46,-1180 81.54,-1562 1280.56,-1562 1357,-1485.56 1357,-707.46 1044.54,-395 945,-395 794.53,-244.53 U3.39
  Bottom Layer w10: v1(-330,-1180) -330,-1095 -305,-1070 -305,-975 J4.8
NRF_MISO: J4.7 R9.2 U3.22 | length 1106.6
  Top Layer w10: J4.7 -255,-1088.38 -143.38,-1200 -86.62,-1200 -41.62,-1155 R9.2 25.79,-1114.21 U3.22
NRF_MOSI: J4.6 R11.2 U3.23 | length 1255.2
  Top Layer w10: J4.6 -345,-925 -295,-875 -225,-875 -55,-1045 v1(-30,-1045) ; U3.23 45.47,-1020.47 95,-1070 95,-1150 R11.2@90,-1155
  Bottom Layer w10: v1(-30,-1045) v1(65,-1045)
NRF_SCK: J4.5 R8.2 U3.21 | length 1155.2
  Top Layer w10: J4.5 -335,-1025 -285,-975 -235,-975 -195,-1015 -195,-1075 R8.2 -95,-1155 7.79,-1052.21 7.79,-435.19 U3.21
OLED_CS: J2.7 U3.33 | length 1195.6
  Top Layer w10: U3.33 426.02,-362.64 573,-509.62 573,-566.38 596.62,-590 655,-590 712,-647 712,-772.14 769.86,-830 1090,-830 J2.7
OLED_D0_SCK: J2.3 R27.1 U3.34 | length 750.5
  Top Layer w10: U3.34 442.95,-342.95 640,-540 730,-540 730,-730 J2.3
OLED_D1_MOSI: J2.4 R28.1 U3.36 | length 921.7
  Top Layer w10: U3.36 295.19,-305.27 640.27,-305.27 772,-437 772,-612 796,-636 R28.1@860,-636 ; J2.4 R28.1
OLED_DC: J2.6 U3.37 | length 1065.8
  Top Layer w10: U3.37 648.9,-283.9 ; 648.9,-285 650,-285 790,-425 790,-575 815,-600 925,-600 1060,-735 J2.6
OLED_RES: J2.5 U3.35 | length 1052.8
  Top Layer w10: U3.35 295.19,-324.95 629.95,-324.95 754,-449 754,-693.86 810,-749.86 810,-785 835,-810 910,-810 J2.5
RST: C13.1 R7.2 S1.1 U3.7 | length 1639.6
  Top Layer w10: R7.2 -1441.83,-160 S1.1 -1255,-57.44 C13.1 -1155,-160 v1(-1145,-170) ; v1(-990,-255) -435.91,-255 -366.38,-185.47 U3.7
  Bottom Layer w10: v1(-1145,-170) -1060,-255 v1(-990,-255)
RUD1_PWM: P7.3 U3.16 | length 1768.3
  Top Layer w10: v1(-920,-1320) -920,-1190 -895,-1165 -805,-1165 -765,-1125 -765,-998.49 -496.51,-730 -195,-730 -143.5,-678.5 U3.16
  Bottom Layer w10: P7.3 v1(-920,-1320)
RUD2_PWM: P6.3 U3.17 | length 1658.4
  Top Layer w10: v1(-685,-1340) -662,-1317 -662,-971.86 -474.14,-784 -172.63,-784 -72.64,-684.01 U3.17
  Bottom Layer w10: v1(-685,-1340) -685,-1400 -505,-1580 P6.3@-500,-1575
SWCLK: J5.3 U3.49 | length 790.7
  Top Layer w10: U3.49 222.64,91.27 346.37,215 550,215 560,225 v1(680,225) ; J5.3 J5.3@780,110
  Bottom Layer w10: v1(680,225) 680,175 754.37,100.63 J5.3
SWDIO: J5.2 U3.46 | length 539.8
  Top Layer w10: U3.46 651.38,-106.73 J5.2
UART1RX: J1.2 R18.2 U3.43 | length 1345.3
  Top Layer w10: U3.43 1314.21,-165.79 R18.2 1420,-140 J1.2
UART1TX: J1.3 R15.2 U3.42 | length 1318.2
  Top Layer w10: U3.42 1315.47,-185.47 1380,-250 R15.2 ; 1410,-240 J1.3
VCC-3.3V: C1.1 C2.1 C3.2 C4.1 C6.1 C7.1 C8.1 C9.2 C10.2 C18.2 C19.2 C20.2 C24.1 C26.1 J2.2 J3.1 J4.2 J5.1 J8.7 P2.2 P2.4 P2.6 P2.8 P2.10 P2.12 R1.2 R2.2 R3.2 R7.1 R8.1 R9.1 R11.1 R13.2 R15.1 R16.2 R18.1 R19.2 R20.2 R27.2 R28.2 R29.1 R30.2 R32.2 R33.2 R34.2 R37.2 R38.2 R39.2 R40.1 R41.2 U1.5 U2.1 U3.13 U3.19 U3.32 U3.48 U3.64 | length 20175
  Top Layer w10: C18.2 C19.2 R40.1 ; -1073.39,-1455 -1015,-1396.61 -1015,-1285 -1275,-1025 R29.1 -1330,-1008.38 -1380,-958.38 -1380,-660 -1345,-625 -1075,-625 -1065,-635 ; v1(-635,-775) -635,-685 -253.58,-303.58 U3.13 -109.95,-303.58 -107.17,-300.8 -106.97,-300.8 -53.44,-247.27 v1(-53.44,-196.56) ; v1(-510,-1340) -510,-1285 -560,-1235 C2.1 -625,-1090 -625,-995 J4.2 -555,-891.82 -465.18,-802 -165.18,-802 -33.27,-670.09 U3.19 ; R13.2 -260,460 R16.2 -315,295 -256.62,295 -201.62,240 C3.2 -145,280 J3.1 -142.27,361.87 -72,291.6 U3.64@-72,4.14 ; R8.1 R9.1 R11.1@90,-1245 ; U3.64@-72.64,-30.25 U3.64 ; -69.86,-33.03 -12.88,-90 v1(30,-90) ; v1(10,-1390) 10,-1325 R11.1@90,-1245 ; R11.1 R11.1@99.57,-1235.43 ; R34.2 R33.2 218.82,-1235.43 R11.1@99.57,-1235.43 ; R27.2 530,-548.84 616.16,-635 C6.1 620,-725.06 657.47,-762.53 657.47,-982.53 U2.1 ; 660,-960 675,-975 919.13,-975 974.13,-920 R3.2 1290,-920 1315,-895 1315,-725 1145,-555 R28.2 ; J5.1 826.85,-10 895,-10 ; v1(1230,135) R18.1@1375,-10 ; v1(1230,285) 1235,290 R20.2 ; R20.2@1235,380 R19.2 R19.2@1235,515 ; R15.1 1425,-360 1495,-290 1635,-290 1665,-260 1665,-110 1645,-90 1460,-90 R18.1 R18.1@1375,-10 ; R11.1@90,-1245 R11.1@99.57,-1235.43 ; R11.1@99.57,-1235.43 190,-1145 U2.1 ; U2.1 375,-1025 C1.1 222.64,-922.64 U3.32 220.95,-431.82 220.95,-296.35 207,-282.4 207,-120.12 259.75,-67.36 U3.48 557.64,-67.36 683.51,58.51 826.49,58.51 895,-10 ; 895,-10 R18.1@1375,-10
  Top Layer w20: R39.2 R38.2 R37.2 ; P2.4@-1525,-1620 P2.4 ; P2.2 P2.4 ; -1510,-1455 -1073.39,-1455 v1(-510,-1455) v1(-175,-1455) ; P2.12 P2.10 P2.8 P2.6 ; v1(-1435,-365) -1440,-370 -1685,-370 R37.2 ; J8.7 -1315,-465 C20.2 ; U1.5 -1214.71,872.11 C8.1 C7.1 -1104.07,465.93 C10.2 ; R32.2 -1065,-635 R41.2 ; v1(-580,200) -759.54,200 -877.54,318 -958,318 C10.2 ; -1775,-275 -1775,-1325 -1595,-1505 P2.6 ; -1775,-275 -1665,-165 -1630,-165 -1605,-140 R1.2 C4.1 -1425,100 -1210,100 C18.2 -1165,180 -1215,230 -1215,355 C10.2 ; -1775,-275 -1685,-365 R37.2 ; P2.4 P2.6
  Bottom Layer w10: v1(-635,-775) -635,-845 J4.2 ; v1(-510,-1455) v1(-510,-1340) ; v1(-175,-1455) -55,-1455 v1(10,-1390) ; v1(1230,135) v1(1230,285)
  Bottom Layer w20: v1(-1435,-365) -1330,-470 J8.7 ; v1(-580,200) -306.87,200 J3.1
VCC-5V: C11.1 C12.1 C22.2 C23.1 C25.1 D1.1 J6.1 J9.2 P1.2 P1.4 P1.6 P1.8 P1.10 P1.12 P4.2 P5.2 P6.2 P7.2 Q1.3 Q2.3 Q5.3 Q6.3 R4.2 R5.2 R6.2 R35.2 R36.2 S2.1 U4.14 U5.14 | length 14875
  Top Layer w10: C11.1 -1730,1000 -1730,1315 -1580,1465 -1485,1465 -1440,1510 -1440,1615 -1488.11,1663.11 P4.2 ; U5.14 -465,730 -185,1010 -185,1410 ; U4.14 448.66,827.29 469.37,848 1284.37,848 1411.37,975 1600,975
  Top Layer w20: Q1.3 -730,1150 R5.2 ; Q2.3 -138.33,1153.33 R6.2 ; Q5.3 453.33,1156.67 R35.2 ; Q6.3 1045,1160 R36.2
  Top Layer w30: C11.1 -1545.16,920 -1495,869.84 ; S2.1 -1318.91,693.74 -1495,869.84 ; P7.2 -720,-1680 -500,-1680 ; Q1.3 -730,1410 ; P6.2 -500,-1680 ; Q2.3 -138.33,1408.33 -140,1410 ; C12.1 70,1460 20,1410 ; Q5.3 453.33,1406.67 450,1410 ; Q6.3 1045,1405 ; C23.1@1510,-740 C25.1 P1.12@1593.39,-925 ; P5.2@1510,1430 1580,1360 1580,1305 1505,1230 1325,1410 450,1410 ; v1(1605,1140) 1605,565 1525,485 J9.2 1595,360 J6.1 1617,213 1681.6,213 1788,106.6 1788,-545.39 C25.1@1610,-723.39 ; 1610,-1475 P1.12@1610,-930 ; 1612.5,-1477.5 1410,-1680 -500,-1680 ; -1495,869.84 -1495,1155 -1300,1350 D1.1 -1297,1410 -730,1410 ; -730,1410 -185,1410 -140,1410 ; -140,1410 20,1410 ; 20,1410 450,1410
  Bottom Layer w30: P5.2@1510,1430 1605,1335 v1(1605,1010)
  other v1: 1605,1055 1605,1095
pads on no net: S2. S2.3 U1.4 U2.5 U2.6 U2.7 U4.6 U4.8 U4.10 U4.12

## Polygon pours and split planes (outlines as drawn)
GND on Bottom Layer "Bottom Layer-No Net" (solid, remove dead copper, pour order 2): -2360,2265 -2360,-2330 2380,-2330 2580,-2130 2580,2375
GND on Top Layer "Bottom Layer-No Net" (solid, remove dead copper, pour order 4): -2270,2275 -2295,2250 -2295,-2245 2165,-2245 2280,-2130 2295,-2115 2295,2300

## Keep-outs
Keep-Out Layer:
  lines w10: -1929.13,-1810.21 -1929.13,1820 ; -1929.13,1810 cw(c-1804.57,1805.43) -1800,1930 ; -1928.73,-1810.21 ccw(c-1810,-1810.98) -1810,-1929.72 ; -1810,-1929.13 1815,-1929.13 ; -1800,1929.13 1810,1929.13 cw(c1807.08,1807.08) 1929.13,1810 ; 1815,-1928.87 ccw(c1815,-1815.98) 1927.89,-1815.98 ; 1929.13,-1815.98 1929.13,1815

## Silkscreen, mask and mechanical layers (free items; w line width, h text height)
Top Overlay:
  text "左电机" at -1375,1705 h118.11
  text "右电机" at 1030,1705 h118.11
  text "蓝牙" at 1425,1055 h118.11
  text "BMP180" at -425,815 h118.11
  text "电源" at -1850,285 h118.11
  text "UART1" at 1175,95 h118.11
  text "B1" at 295,75 h118.11
  text "SWD" at 925,-35 h118.11
  text "ESP8266" at -1895,-400 h118.11
  text "OLED" at 965,-670 h118.11
  text "BOOT0" at 780,-875 h59.06
  text "NRF24L01" at -100,-915 h118.11
  text "IO扩展" at -1215,-985 h118.11
  text "3.3V扩展" at -1275,-1435 h118.11
  text "5V扩展" at 1520,-1645 h118.11
  text "V1.1" at 10,-1700 h118.11
  text "MPU6050" at 560,-1705 h118.11
  text "舵机2" at -525,-1750 h118.11
  text "舵机1" at -945,-1755 h118.11
Drill Drawing:
  text ".LEGEND" at 207,-2467 h31.5
  text "100 * 100 mm" at -1076,-2495 h31.5
  text "Drill Drawing." at 212,-2597 h31.5

## Text inside footprints (layer, text, board x,y; h text height)
J4: Top Overlay "2" at -645,-930 h31.5; Top Overlay "1" at -645,-1060 h31.5; Top Overlay "7" at -185,-1050 h31.5; Top Overlay "8" at -180,-940 h31.5
P1: Top Overlay "1" at 1790,-1440 h31.5; Top Overlay "2" at 1625,-1525 h31.5 r90
P2: Top Overlay "1" at -1300,-1745 h31.5 r90